# Altium PCB Analog_Audio_Processor.PcbDoc
Units mm, origin at the board's own origin, x right, y up, seen from the top; angles counter-clockwise.
Board outline 200 x 150 mm, 2 copper layers (Top Layer, Bottom Layer); 158 components, 105 nets, 435 pads, 17 vias.
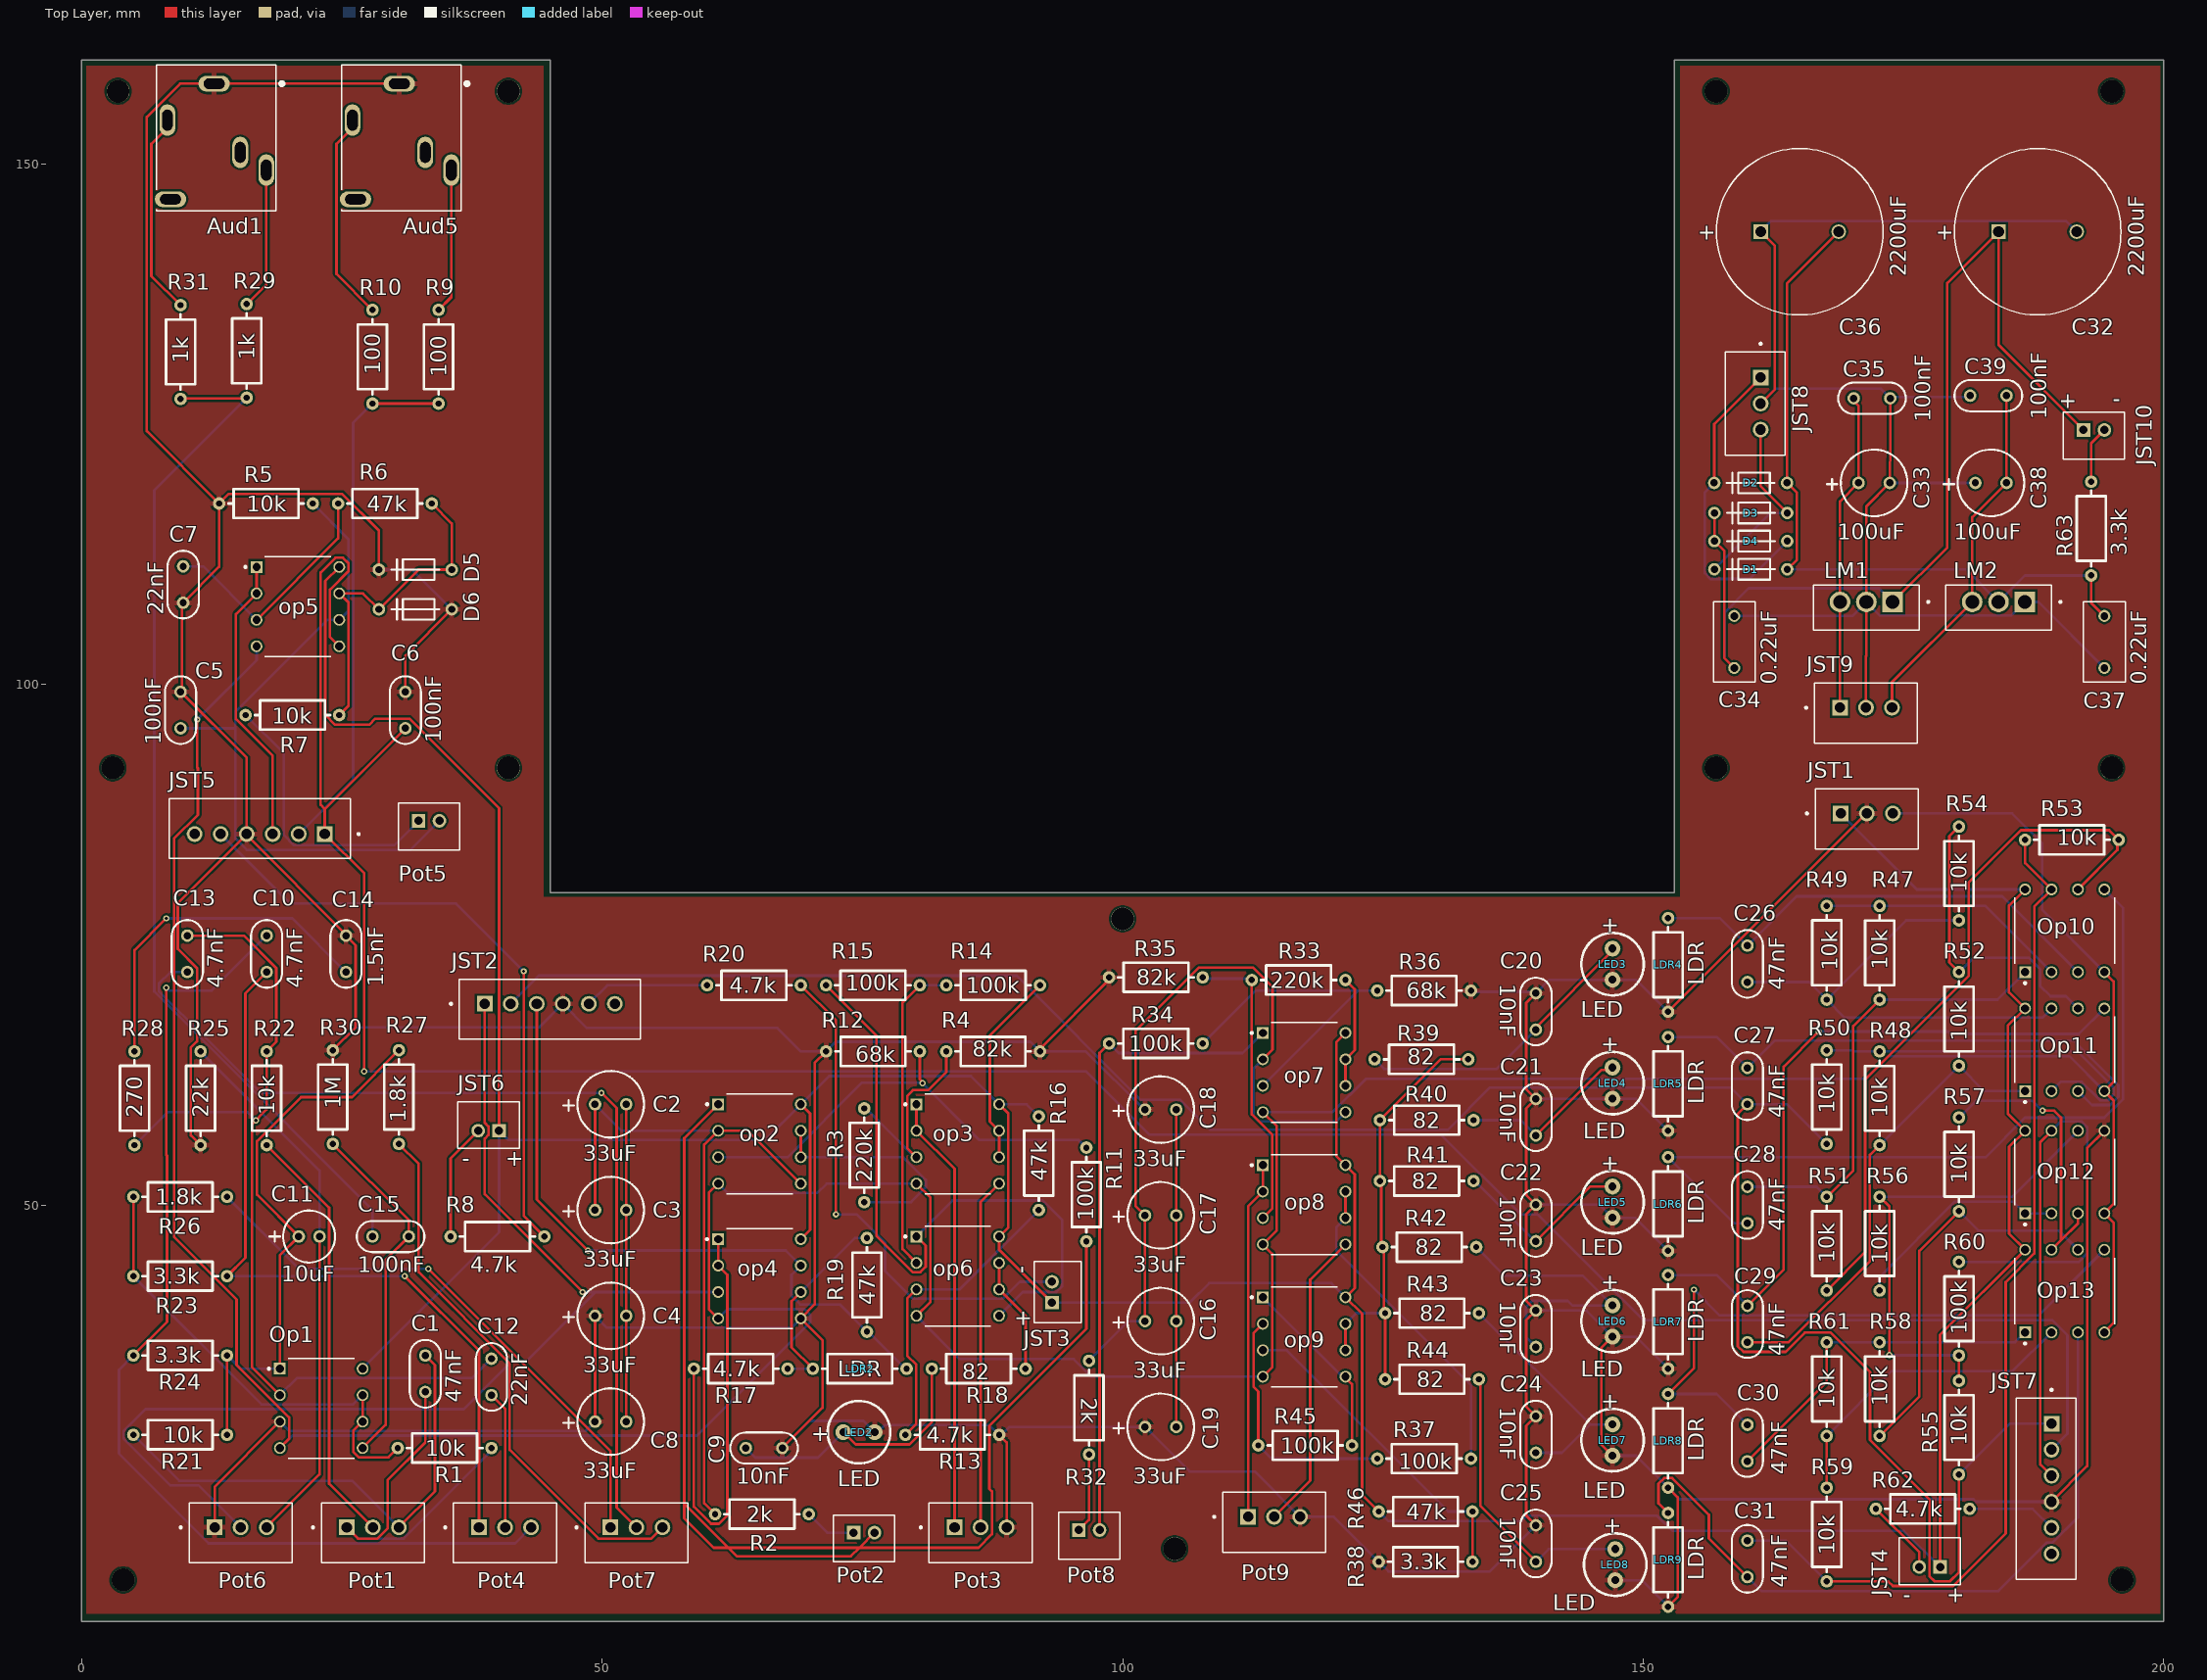
[diagram p0: Top Layer view]
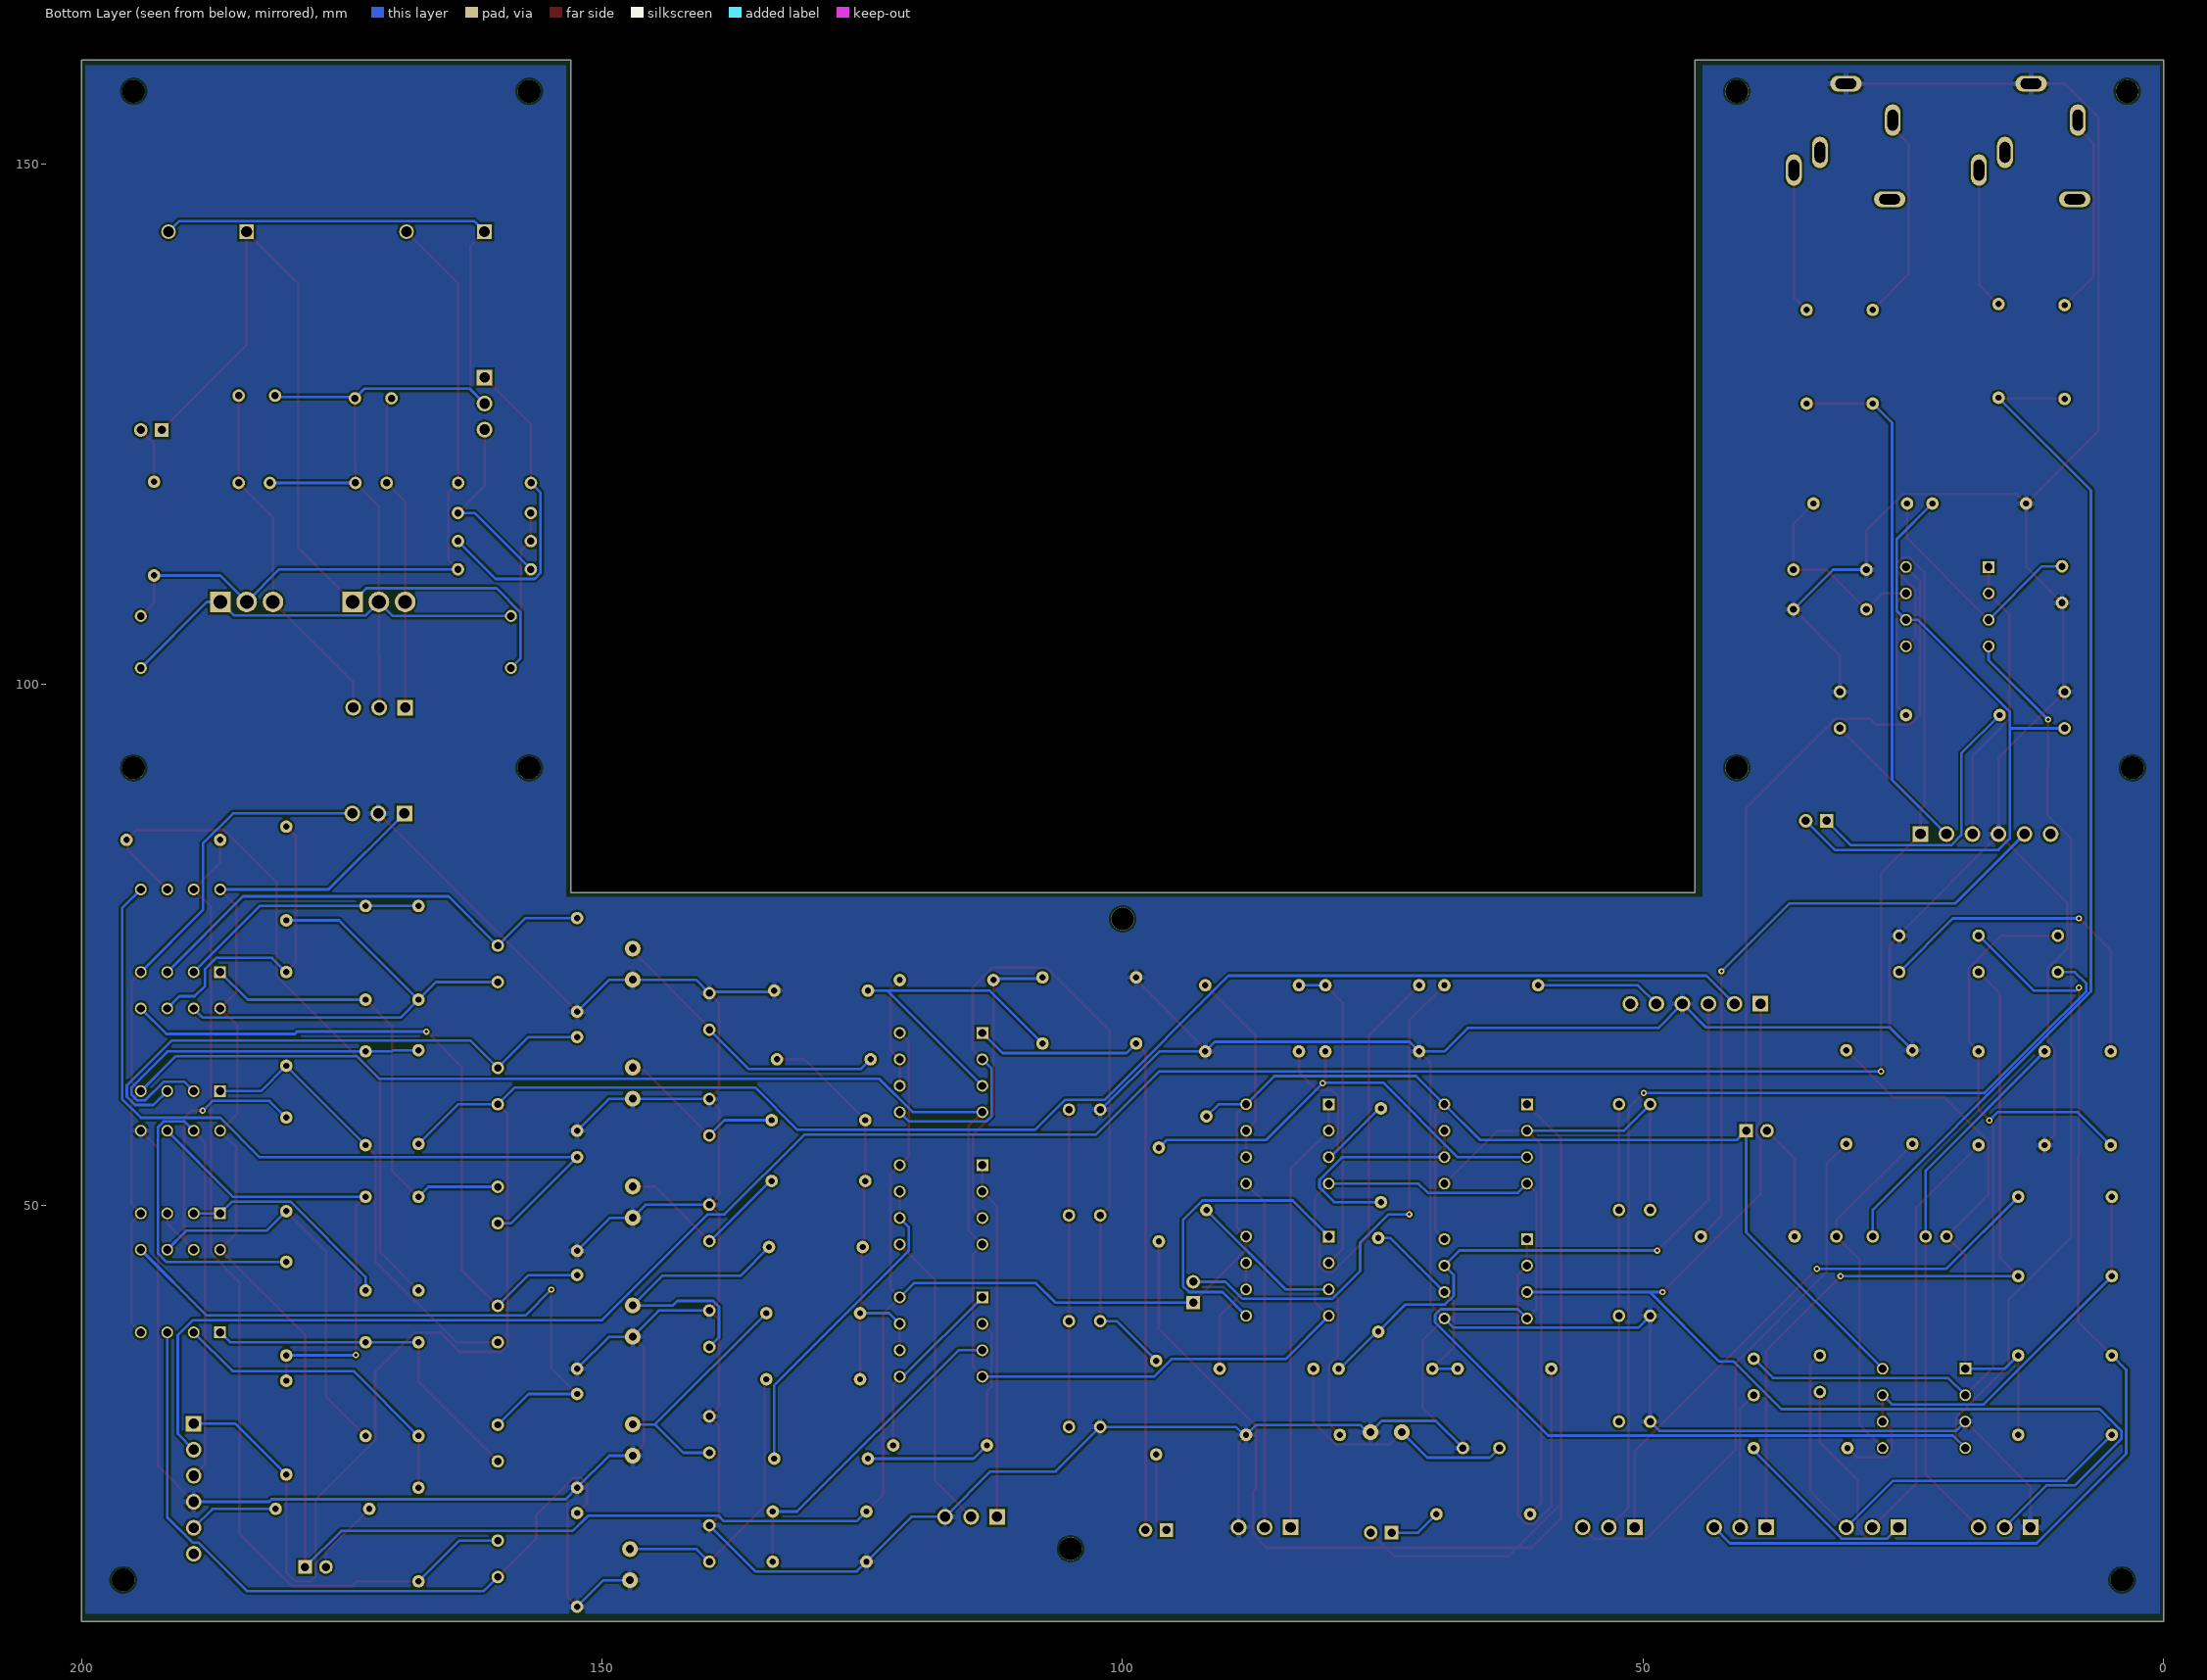
[diagram p1: Bottom Layer view, seen from below]

## Layer stack, top to bottom
Top Solder: solder mask 0.0102, Solder Resist, Dk 3.5
Top Layer: signal copper 0.0356
Dielectric 1: dielectric 0.32, FR-4, Dk 4.8
Bottom Layer: signal copper 0.0356
Bottom Solder: solder mask 0.0102, Solder Resist, Dk 3.5

## Board outline
0,10 0,160 45,160 45,80 153,80 153,160 200,160 200,10

## Design rules (kind name [scope] priority, off if disabled: settings)
BoardOutlineClearance [All] p1: gap=0.3 ignorepadtopadclearanceinfootprint=FALSE except(0.4: Arc-SplitBarrior Arc-SplitContinuation Track-SplitBarrior Track-SplitContinuation SMDPad-SplitBarrior SMDPad-SplitContinuation THPad-SplitBarrior THPad-SplitContinuation Via-SplitBarrior Via-SplitContinuation Fill-SplitBarrior Fill-SplitContinuation Poly-SplitBarrior Poly-SplitContinuation Region-SplitBarrior Region-SplitContinuation Text-SplitBarrior Text-SplitContinuation)
Clearance "Clearance Different Nets" [All] p1: gap=0.2 ignorepadtopadclearanceinfootprint=FALSE except(0.089: Arc-Arc Arc-Track Arc-SMDPad Track-Track Track-SMDPad; 0.127: SMDPad-SMDPad SMDPad-Via THPad-Via Via-Via; 0.254: Arc-Via Arc-Text Track-Via Track-Text SMDPad-Text THPad-Text Via-Text Fill-Text Poly-Text Region-Text Text-Text; 0.5: THPad-THPad Via-Hole)
Clearance "Clearance Same Nets" [All] p2: gap=0.2 ignorepadtopadclearanceinfootprint=FALSE except(0.089: Arc-Arc Arc-Track Arc-SMDPad Track-Track Track-SMDPad SMDPad-SMDPad; 0.127: SMDPad-Via THPad-Via; 0.254: Arc-Via Arc-Text Track-Via Track-Text SMDPad-Text THPad-Text Via-Via Via-Text Fill-Text Poly-Text Region-Text Text-Text)
Clearance "Clearance Bottom Layer" [OnLayer('Bottom Layer')] p3: gap=0.203 ignorepadtopadclearanceinfootprint=TRUE except(0.254: Arc-Text Track-Text SMDPad-Text THPad-Text Via-Text Fill-Text Poly-Text Region-Text Text-Text)
Clearance "Clearance Top Layer" [OnLayer('Top Layer')] p4: gap=0.203 ignorepadtopadclearanceinfootprint=TRUE except(0.254: Arc-Text Track-Text SMDPad-Text THPad-Text Via-Text Fill-Text Poly-Text Region-Text Text-Text)
HoleSize [All] p1: absolutevalues=TRUE maxlimit=6.3 minlimit=0.2 maxpercent=80.000 minpercent=20.000
MinimumAnnularRing [All] p1: minimumring=0.13
MinimumSolderMaskSliver [All] p1: minsoldermaskwidth=0.1
PolygonConnect PolygonConnect_1 [All] p1: thpad.connectstyle=Relief thpad.reliefconductorwidth=0.508 thpad.reliefentries=4 thpad.polygonreliefangle="90 Angle" thpad.airgapwidth=0.254 smdpad.connectstyle=Relief smdpad.reliefconductorwidth=0.508 smdpad.reliefentries=4 smdpad.polygonreliefangle="90 Angle" smdpad.airgapwidth=0.254 via.connectstyle=Direct via.reliefconductorwidth=0.508 via.reliefentries=4 via.polygonreliefangle="90 Angle" via.airgapwidth=0.254
RoutingCorners [All] p1: cornerstyle=Round minsetback=2.54 maxsetback=2.54
RoutingVias [All] p1: holewidth=0.5 width=1 viastyle="Through Hole" minholewidth=0.2 minwidth=0.35 maxholewidth=1 maxwidth=2
SilkToSilkClearance [All] p1: silktosilkclearance=0.1
SilkToSolderMaskClearance [IsPad] p1: minsilkscreentomaskgap=0.1 clearancetoexposedcopper=TRUE
SolderMaskExpansion [All] p1: expansion=0.102 istentingtop=FALSE
Width [All] p1: maxlimit=2.54 minlimit=0.089 preferedwidth=0.381
25 further rules are at their usual default settings.

## Classes and differential pairs
component class Tremolo: C2 C3 C4 C8 C9 JST2 JST3 LDR2 LED2 op2 op3 op4 op6 Pot2 Pot3 R2 R3 R4 R11 R12 R13 R14 R15 R16 R17 R18 R19 R20
component class Power_supply: C32 C33 C34 C35 C36 C37 C38 C39 D1 D2 D3 D4 JST8 JST9 JST10 LM1 LM2 R63
component class Phaser_2: C26 C27 C28 C29 C30 C31 JST4 JST7 LDR4 LDR5 LDR6 LDR7 LDR8 LDR9 Op10 Op11 Op12 Op13 R47 R48 R49 R50 R51 R52 R53 R54 R55 R56 R57 R58 R59 R60 R61 R62
component class Phaser_1: C16 C17 C18 C19 C20 C21 C22 C23 C24 C25 LED3 LED4 LED5 LED6 LED7 LED8 op7 op8 op9 Pot8 Pot9 R32 R33 R34 R35 R36 R37 R38 R39 R40 R41 R42 R43 R44 R45 R46
component class Inputbuffer_Equalizer: Aud1 C1 C10 C11 C12 C13 C14 C15 JST1 Op1 Pot1 Pot4 Pot6 Pot7 R1 R21 R22 R23 R24 R25 R26 R27 R28 R29 R30 R31
component class Distortion_outputbuffer: Aud5 C5 C6 C7 D5 D6 JST5 JST6 op5 Pot5 R5 R6 R7 R8 R9 R10

## Components (designator, comment, footprint, x,y, rotation, side; value= is the part's Value field where it differs from the comment)
Aud1 "Audio Female jack" "AUDIO FEMALE JACK" 89.448,153.285 r270 top
Aud5 "Audio Female jack" "AUDIO FEMALE JACK" 107.228,153.285 r270 top
C1 "47nF capacitor" 47nF 33.02,32.06 r90 top
C2 "33uF capacitor" 33uF 49.324,59.69 r0 top
C3 "33uF capacitor" 33uF 49.324,49.53 r0 top
C4 "33uF capacitor" 33uF 49.324,39.37 r0 top
C5 "100nF capacitor" 100nF 9.51,95.81 r90 top
C6 "100nF capacitor" 100nF 31.1,95.81 r90 top
C7 "22nF capacitor" 22nF 9.758,107.866 r90 top
C8 "33uF capacitor" 33uF 49.324,29.21 r0 top
C9 "10nF capacitor" 10nF 63.81,26.67 r0 top
C10 "4.7nF capacitor" 4.7nF 17.78,72.39 r90 top
C11 "10uF capacitor" 10uF 20.86,46.99 r0 top
C12 "22nF capacitor" 22nF 39.37,31.75 r90 top
C13 "4.7nF capacitor" 4.7nF 10.16,72.39 r90 top
C14 "1.5nF capacitor" 1.5nF 25.4,72.39 r90 top
C15 "100nF capacitor" 100nF 27.94,46.99 r0 top
C16 "33uF capacitor" 33uF 102.156,38.862 r0 top
C17 "33uF capacitor" 33uF 102.156,49.022 r0 top
C18 "33uF capacitor" 33uF 102.156,59.182 r0 top
C19 "33uF capacitor" 33uF 102.156,28.702 r0 top
C20 "10nF capacitor" 10nF 139.7,70.358 r270 top
C21 "10nF capacitor" 10nF 139.7,60.198 r270 top
C22 "10nF capacitor" 10nF 139.7,50.038 r270 top
C23 "10nF capacitor" 10nF 139.7,39.878 r270 top
C24 "10nF capacitor" 10nF 139.7,29.718 r270 top
C25 "10nF capacitor" 10nF 139.7,19.248 r270 top
C26 "47nF capacitor" 47nF 160.02,71.43 r90 top
C27 "47nF capacitor" 47nF 160.02,59.69 r90 top
C28 "47nF capacitor" 47nF 160.02,48.26 r90 top
C29 "47nF capacitor" 47nF 160.02,40.33 r270 top
C30 "47nF capacitor" 47nF 160.02,28.9 r270 top
C31 "47nF capacitor" 47nF 160.02,17.78 r270 top
C32 "2200uF capacitor" 2200uF 190.059,197.358 r0 top
C33 "100uF capacitor" 100uF 170.688,119.38 r0 top
C34 "0.22uF capacitor" 0.22uF 129.032,103.719 r90 top
C35 "100nF capacitor" 100nF 170.236,127.508 r0 top
C36 "2200uF capacitor" 2200uF 167.199,197.358 r0 top
C37 "0.22uF capacitor" 0.22uF 164.592,103.719 r90 top
C38 "100uF capacitor" 100uF 181.912,119.38 r0 top
C39 "100nF capacitor" 100nF 181.412,127.762 r0 top
D1 "1N4007 diode" 1N4148 163.847,111.081 r180 top
D2 "1N4007 diode" 1N4148 163.83,119.38 r180 top
D3 "1N4007 diode" 1N4148 163.847,116.497 r180 top
D4 "1N4007 diode" 1N4148 163.847,113.789 r180 top
D5 "1N4148 diode" 1N4148 35.56,111.05 r180 top
D6 "1N4148 diode" 1N4148 35.56,107.24 r180 top
JST1 "Power" 3pin_jst 168.823,68.563 r180 top
JST2 "Trem_out" 6pin_JST 39.771,-16.4 r180 top
JST3 "LED" 2pin_JST 103.928,39.481 r270 top
JST4 "LED" 2pin_JST 179.689,25.95 r0 top
JST5 "6pin_JST" 6pin_JST 22.317,171.392 r0 top
JST6 "LED" 2pin_JST 41.259,67.86 r0 top
JST7 "6pin_JST" 6pin_JST 103.488,27.967 r90 top
JST8 "Power" 3pin_jst 142.223,129.667 r90 top
JST9 "Power" 3pin_jst 168.743,78.723 r180 top
JST10 "LED" 2pin_JST 191.151,113.75 r180 top
LDR2 "LDR" LDR 70.248,34.29 r0 top
LDR4 "LDR" LDR 152.4,68.58 r90 top
LDR5 "LDR" LDR 152.4,57.15 r90 top
LDR6 "LDR" LDR 152.4,45.61 r90 top
LDR7 "LDR" LDR 152.4,34.29 r90 top
LDR8 "LDR" LDR 152.4,22.86 r90 top
LDR9 "LDR" LDR 152.4,11.43 r90 top
LED2 "Tremolo_LED" LED 74.676,28.194 r0 top
LED3 "LED" LED 147.066,73.152 r270 top
LED4 "LED" LED 147.066,61.722 r270 top
LED5 "LED" LED 147.066,50.292 r270 top
LED6 "LED" LED 147.066,38.862 r270 top
LED7 "LED" LED 147.066,27.432 r270 top
LED8 "LED" LED 147.32,15.47 r270 top
LM1 "LM7812" LM7812 168.651,71.596 r180 top
LM2 "LM7912" LM7912 181.351,71.596 r180 top
Op1 "TL072CP" TL072CP 27.592,67.945 r0 top
op2 "TL072CP" TL072CP 69.69,93.345 r0 top
op3 "TL072CP" TL072CP 88.74,93.345 r0 top
op4 "TL072CP" TL072CP 69.69,80.391 r0 top
op5 "TL072CP" TL072CP 25.352,144.959 r0 top
op6 "TL072CP" TL072CP 88.74,80.645 r0 top
op7 "TL072CP" TL072CP 122.014,100.203 r0 top
op8 "TL072CP" TL072CP 122.014,87.503 r0 top
op9 "TL072CP" TL072CP 122.014,74.803 r0 top
Op10 "TL072CP" TL072CP 153.035,80.932 r90 top
Op11 "TL072CP" TL072CP 153.035,69.502 r90 top
Op12 "TL072CP" TL072CP 153.035,57.752 r90 top
Op13 "TL072CP" TL072CP 153.035,46.322 r90 top
Pot1 "Equalizer_Bass" 3pin_jst 25.313,-0.017 r180 top
Pot2 "Tremolo_20k_potentiometer" 2pin_JST_non_polarized 73.009,7.832 r180 top
Pot3 "Tremolo_100k_potentiometer" 3pin_jst 83.693,-0.017 r180 top
Pot4 "Equalizer_Mid" 3pin_jst 38.013,-0.017 r180 top
Pot5 "Overdrive_potentiometer" 2pin_JST_non_polarized 31.211,76.21 r180 top
Pot6 "Volume" 3pin_jst 12.613,-0.017 r180 top
Pot7 "Equalizer_Treble" 3pin_jst 50.633,-0.017 r180 top
Pot8 "Phaser_20k_potentiometer" 2pin_JST_non_polarized 94.631,8.086 r180 top
Pot9 "Phaser_100k_potentiometer" 3pin_jst 111.887,0.999 r180 top
R1 "10k resistor" 10k 30.37,26.67 r0 top
R2 "2k resistor" 2k 60.85,20.32 r0 top
R3 "220k resistor" 220k 75.184,50.292 r90 top
R4 "82k resistor" 82k 92.058,64.77 r180 top
R5 "10k resistor" 10k 13.21,117.4 r0 top
R6 "47k resistor" 47k 33.64,117.4 r180 top
R7 "10k resistor" 10k 15.75,97.08 r0 top
R8 "4.7k resistor" 4.7k 35.45,46.99 r0 top
R9 "100ohm resistor" 100 34.29,136 r270 top
R10 "100ohm resistor" 100 27.94,136 r270 top
R11 "100k resistor" 100k 96.52,55.524 r270 top (schematic designator R?)
R12 "68k resistor" 68k 71.518,64.77 r0 top
R13 "4.7k resistor" 4.7k 79.138,27.94 r0 top
R14 "100k resistor" 100k 83.058,71.12 r0 top
R15 "100k resistor" 100k 80.518,71.12 r180 top
R16 "47k resistor" 47k 91.948,49.53 r90 top
R17 "4.7k resistor" 4.7k 67.818,34.29 r180 top
R18 "82ohm resistor" 82 90.678,34.29 r180 top
R19 "47k resistor" 47k 75.438,46.846 r270 top
R20 "4.7k resistor" 4.7k 69.088,71.12 r180 top
R21 "10k resistor" 10k 4.97,27.94 r0 top
R22 "10k resistor" 10k 17.78,55.77 r90 top
R23 "3.3k resistor" 3.3k 4.97,43.18 r0 top
R24 "3.3k resistor" 3.3k 4.97,35.56 r0 top
R25 "22k resistor" 22k 11.43,55.77 r90 top
R26 "1.8k resistor" 1.8k 4.97,50.8 r0 top
R27 "1.8k resistor" 1.8k 30.48,55.88 r90 top
R28 "270ohm resistor" 270 5.08,55.77 r90 top
R29 "1k resistor" 1k 15.86,127.56 r90 top
R30 "1M resistor" 1M 24.13,55.88 r90 top
R31 "1k resistor" 1k 9.51,127.45 r90 top
R32 "2k resistor" 2k 96.774,35.052 r270 top
R33 "220k resistor" 220k 121.412,71.628 r180 top
R34 "100k resistor" 100k 107.696,65.532 r180 top
R35 "82k resistor" 82k 98.696,71.882 r0 top
R36 "68k resistor" 68k 133.46,70.612 r180 top
R37 "100k resistor" 100k 124.46,25.654 r0 top
R38 "3.3k resistor" 3.3k 133.604,15.748 r180 top
R39 "82ohm resistor" 82 124.206,64.008 r0 top
R40 "82ohm resistor" 82 133.714,58.166 r180 top
R41 "82ohm resistor" 82 133.714,52.324 r180 top
R42 "82ohm resistor" 82 133.968,45.974 r180 top
R43 "82ohm resistor" 82 134.222,39.624 r180 top
R44 "82ohm resistor" 82 134.222,33.274 r180 top
R45 "100k resistor" 100k 113.03,26.924 r0 top
R46 "47k resistor" 47k 133.604,20.574 r180 top
R47 "10k resistor" 10k 172.72,78.74 r270 top
R48 "10k resistor" 10k 172.72,64.77 r270 top
R49 "10k resistor" 10k 167.64,69.74 r90 top
R50 "10k resistor" 10k 167.64,55.88 r90 top
R51 "10k resistor" 10k 167.64,41.8 r90 top
R52 "10k resistor" 10k 180.34,72.39 r270 top
R53 "10k resistor" 10k 195.69,85.09 r180 top
R54 "10k resistor" 10k 180.34,86.36 r270 top
R55 "10k resistor" 10k 180.34,24.13 r90 top
R56 "10k resistor" 10k 172.72,41.8 r90 top
R57 "10k resistor" 10k 180.34,49.42 r90 top
R58 "10k resistor" 10k 172.72,27.83 r90 top
R59 "10k resistor" 10k 167.64,13.86 r90 top
R60 "100k resistor" 100k 180.34,44.56 r270 top
R61 "10k resistor" 10k 167.64,27.83 r90 top
R62 "4.7k resistor" 4.7k 172.356,20.828 r0 top
R63 "3.3k resistor" 3.3k 193.04,110.49 r90 top

## Footprints (in the part's own frame and the unit in brackets; to place one, negate y for a bottom-side part, rotate by r counter-clockwise, add the part's x,y. Pads: shape width x height; smd on the part's side, far side on the other; paste and mask are expansions set on the pad)
0.22uF [mm]
  round 1.15 hole 0.75: 1(-2.119,-29.718) 2(2.881,-29.718)
  silkscreen extent -3.47,-31.72 4.23,-27.72
1.5nF [mm]
  round 1.2 hole 0.7: 1(0,0) 2(3.5,0)
  silkscreen extent -1.5,-1.5 5,1.5
1.8k [mm]
  round 1.2 hole 0.6: 1(0,0) 2(9,0)
  silkscreen extent 0.89,-1.4 8.13,1.4
1k [mm]
  round 1.2 hole 0.6: 1(0,0) 2(9,0)
  silkscreen extent 0.89,-1.4 8.13,1.4
1M [mm]
  round 1.2 hole 0.6: 1(0,0) 2(9,0)
  silkscreen extent 0.89,-1.4 8.13,1.4
1N4148 [mm]
  round 1.2 hole 0.7: A(0,0) K(7,0)
  silkscreen extent 1.2,-1 5.8,1
2k [mm]
  round 1.2 hole 0.6: 1(0,0) 2(9,0)
  silkscreen extent 0.89,-1.4 8.13,1.4
2pin_JST [mm]
  rect 1.308x1.308 / inner round 1.308 / far side rect 1.308x1.308 hole 0.8: 1(-1.159,-10.71)
  round 1.308 hole 0.8: 2(-3.159,-10.71)
  silkscreen extent -5.11,-12.41 0.79,-7.91, body extent -5.11,-12.41 0.79,-7.91, height 6
2pin_JST_non_polarized [mm]
  rect 1.308x1.308 / inner round 1.308 / far side rect 1.308x1.308 hole 0.8: 1(-1.159,-10.71)
  round 1.308 hole 0.8: 2(-3.159,-10.71)
  silkscreen extent -5.11,-12.41 0.79,-7.91, body extent -5.11,-12.41 0.79,-7.91, height 6
3.3k [mm]
  round 1.2 hole 0.6: 1(0,0) 2(9,0)
  silkscreen extent 0.89,-1.4 8.13,1.4
3pin_jst [mm]
  rect 1.508x1.508 / inner round 1.508 / far side rect 1.508x1.508 hole 1: 1(-0.167,-19.067)
  round 1.508 hole 1: 2(-2.667,-19.067) 3(-5.167,-19.067)
  silkscreen extent -7.62,-21.42 3.18,-15.67, body extent -7.62,-21.42 2.28,-15.67, height 7
4.7k [mm]
  round 1.2 hole 0.6: 1(0,0) 2(9,0)
  silkscreen extent 0.89,-1.4 8.13,1.4
4.7nF [mm]
  round 1.2 hole 0.7: 1(0,0) 2(3.5,0)
  silkscreen extent -1.5,-1.5 5,1.5
6pin_JST [mm]
  rect 1.508x1.508 / inner round 1.508 / far side rect 1.508x1.508 hole 1: 1(1.043,-85.742)
  round 1.508 hole 1: 2(-1.457,-85.742) 3(-3.957,-85.742) 4(-6.457,-85.742) 5(-8.957,-85.742) 6(-11.457,-85.742)
  silkscreen extent -13.91,-88.09 4.39,-82.34, body extent -13.91,-88.09 3.49,-82.34, height 7
10k [mm]
  round 1.2 hole 0.6: 1(0,0) 2(9,0)
  silkscreen extent 0.89,-1.4 8.13,1.4
10nF [mm]
  round 1.2 hole 0.7: 1(0,0) 2(3.5,0)
  silkscreen extent -1.5,-1.5 5,1.5
10uF [mm]
  round 1.2 hole 0.7: 1(0,0) 2(2,0)
  silkscreen extent -2.79,-2.5 3.5,2.5
22k [mm]
  round 1.2 hole 0.6: 1(0,0) 2(9,0)
  silkscreen extent 0.89,-1.4 8.13,1.4
22nF [mm]
  round 1.2 hole 0.7: 1(0,0) 2(3.5,0)
  silkscreen extent -1.5,-1.5 5,1.5
33uF [mm]
  round 1.2 hole 0.7: 1(0,0) 2(3,0)
  silkscreen extent -3.05,-3.2 4.7,3.2
47k [mm]
  round 1.2 hole 0.6: 1(0,0) 2(9,0)
  silkscreen extent 0.89,-1.4 8.13,1.4
47nF [mm]
  round 1.2 hole 0.7: 1(0,0) 2(3.5,0)
  silkscreen extent -1.5,-1.5 5,1.5
68k [mm]
  round 1.2 hole 0.6: 1(0,0) 2(9,0)
  silkscreen extent 0.89,-1.4 8.13,1.4
82 [mm]
  round 1.2 hole 0.6: 1(0,0) 2(9,0)
  silkscreen extent 0.89,-1.4 8.13,1.4
82k [mm]
  round 1.2 hole 0.6: 1(0,0) 2(9,0)
  silkscreen extent 0.89,-1.4 8.13,1.4
100 [mm]
  round 1.2 hole 0.6: 1(0,0) 2(9,0)
  silkscreen extent 0.89,-1.4 8.13,1.4
100k [mm]
  round 1.2 hole 0.6: 1(0,0) 2(9,0)
  silkscreen extent 0.89,-1.4 8.13,1.4
100nF [mm]
  round 1.2 hole 0.7: 1(0,0) 2(3.5,0)
  silkscreen extent -1.5,-1.5 5,1.5
100uF [mm]
  round 1.2 hole 0.7: 1(0,0) 2(3,0)
  silkscreen extent -3.05,-3.2 4.7,3.2
220k [mm]
  round 1.2 hole 0.6: 1(0,0) 2(9,0)
  silkscreen extent 0.89,-1.4 8.13,1.4
270 [mm]
  round 1.2 hole 0.6: 1(0,0) 2(9,0)
  silkscreen extent 0.89,-1.4 8.13,1.4
2200uF [mm]
  rect 1.4x1.4 hole 1.05: 1(-5.909,-53.848)
  round 1.4 hole 1.05: 2(1.591,-53.848)
  silkscreen extent -10.16,-61.84 5.84,-45.85, body extent -10.16,-61.84 5.84,-45.85, height 25
"AUDIO FEMALE JACK" [mm]
  oval 1.508x3.016 hole 1 slot 2 at 90 deg: 1(-4.445,-76.708) 4(6.655,-80.908)
  oval 3.016x1.508 hole 1 slot 2 at 0 deg: 2(-0.945,-81.208) 3(3.855,-71.708) 5(2.155,-74.208)
  silkscreen extent -6.24,-82.26 7.75,-70.04, body extent -9.77,-82.3 7.73,-70.8, height 6
LDR [mm]
  round 1.2 hole 0.6: 1(0,0) 2(9,0)
  silkscreen extent 0.89,-1.4 8.13,1.4
LED [mil]
  round 60 hole 30: 1(-59.06,0) 2(59.06,0)
  silkscreen extent -118,-118 118,118
LM7812 [mm]
  rect 1.98x1.98 / inner round 1.98 / far side rect 1.98x1.98 hole 1.32: 1(-5.329,-36.354)
  round 1.98 hole 1.32: 2(-2.794,-36.354) 3(-0.259,-36.354)
  silkscreen extent -8.83,-37.99 2.29,-33.64, body extent -7.89,-38.03 2.31,-33.53, height 19.22
LM7912 [mm]
  round 1.98 hole 1.32: 1(-2.794,-36.354) 3(-0.259,-36.354)
  rect 1.98x1.98 / inner round 1.98 / far side rect 1.98x1.98 hole 1.32: 2(-5.329,-36.354)
  silkscreen extent -8.83,-37.99 2.29,-33.64, body extent -7.89,-38.03 2.31,-33.53, height 19.22
TL072CP [mm]
  rect 1.13x1.13 / inner round 1.13 / far side rect 1.13x1.13 hole 0.78 mask+0.102: 1(-8.542,-33.655)
  round 1.13 hole 0.78 mask+0.102: 2(-8.542,-36.195) 3(-8.542,-38.735) 4(-8.542,-41.275) 5(-0.602,-41.275) 6(-0.602,-38.735) 7(-0.602,-36.195) 8(-0.602,-33.655)
  silkscreen extent -9.71,-42.26 -1.4,-32.67, body extent -8.72,-42.26 -0.42,-32.67, height 5.08

## Part data
JST1 JST8 JST9 Pot1 Pot3 Pot4 Pot6 Pot7 Pot9: library part 3pin_jst
JST2: library part 6pin_JST
JST3 JST4 JST6 JST10: library part 2pin_JST
LED2: library part LED
Pot2 Pot5 Pot8: library part 2pin_jst_non_polarized

## Free pads (board coordinates)
  round 2.2 hole 2.2 unplated: 12(3,92) 12(3.5,157) 12(4,14) 12(41,92) 12(41,157) 12(100,77.5) 12(105,17) 12(157,92) 12(157,157) 12(195,92) 12(195,157) 12(196,14)

## Via types
v1: diameter 0.6, hole 0.3, Top Layer to Bottom Layer, 17 vias

## Nets (pads, with @x,y where several pads share a name; then routed paths per layer and width w, separated by ;. In a path a pad name is that pad's centre, name@x,y a point inside that pad or via, vN(x,y) a via of type N, cw(c..) or ccw(c..) an arc to the next point about the centre after c; other vN are vias at no path point)
+12: JST1.1 JST3.1 JST4.1 JST6.1 Op1.8 op2.8 op3.8 op4.8 op5.8 op6.8 op7.8 op8.8 op9.8 Op10.8 Op11.8 Op12.8 Op13.8 R16.2 R46.2 | length 414.8
  Top Layer w0.25: op5.8 23.41,109.964 23.41,97.112 24.367,96.155 27.635,96.155 28.215,96.735 31.483,96.735 40.1,88.118 JST6.1 ; op4.8 69.978,47.626 69.978,58.8 op2.8 ; op3.8 89.028,58.8 89.028,47.88 op6.8 88.138,45.72 JST3.1 ; op7.8 120.522,65.658 120.522,54.738 op8.8 122.302,52.958 122.302,42.038 op9.8 123.001,39.559 123.001,22.177 R46.2 ; JST4.1 178.53,37.56 Op13.8 185.166,47.244 185.166,55.626 Op12.8 185.039,58.801 185.039,67.249 Op11.8 185.141,70.449 185.141,78.781 Op10.8
  Bottom Layer w0.25: Op1.8 40.1,47.4 JST6.1 40.99,56.26 65.658,56.26 op2.8 71.799,62.401 85.427,62.401 op3.8 90.788,59.69 R16.2 ; JST3.1 106.441,40.64 108.321,42.52 120.04,42.52 op9.8 ; R46.2 125.529,19.649 138.305,19.649 138.829,20.173 151.349,20.173 152.817,18.705 175.065,18.705 JST4.1 ; JST1.1 176.29,80.33 Op10.8
-12: JST1.3 Op1.4 op2.4 op3.4 op4.4 op5.4 op6.4 op7.4 op8.4 op9.4 Op10.4 Op11.4 Op12.4 Op13.4 | length 413.3
  Top Layer w0.25: v1(11.1,96.647) 11.1,92.06 11.176,91.984 11.176,87.492 8.883,85.199 8.883,46.959 14.895,40.947 14.895,34.646 19.94,29.601 19.94,27.56 Op1.4 ; op4.4 60.258,40.006 60.258,51.18 op2.4 ; op6.4 81.538,40.71 81.538,50.73 op3.4 ; op9.4 114.362,34.418 114.362,45.338 op8.4 114.812,47.568 114.812,57.588 op7.4 ; Op13.4 195.2,38.67 195.2,48.32 Op12.4 195.2,50.1 195.2,60.07 Op11.4 195.2,61.85 195.2,71.5 Op10.4
  Bottom Layer w0.25: v1(11.1,96.647) 16.81,102.357 op5.4 ; Op1.4 20.25,27.87 59.101,27.87 69.978,38.747 69.978,39.485 69.457,40.006 62.038,40.006 op4.4 ; op2.4 62.038,51.18 70.673,51.18 71.563,52.07 op3.4 ; op6.4 84.353,35.215 95.303,35.215 96.99,33.528 op9.4 ; op7.4 120.153,58.928 123.36,62.135 171.393,62.135 173.573,64.315 190.955,64.315 Op11.4 ; JST1.3 185.458,87.63 188.34,84.748 188.34,78.36 Op10.4
GND: Aud1.1 Aud5.1 C4.1 C5.2 C6.2 C7.1 C8.1 C9.2 C14.2 C18.1 C19.1 C20.1 C21.1 C22.1 C23.1 C24.1 C25.1 D5.K D6.A JST1.2 JST2.4 JST5.4 JST7.4 LDR4.1 LDR5.1 LDR6.1 LDR7.1 LDR8.1 LDR9.1 LED2.2 LED3.2 LED4.2 LED5.2 LED6.2 LED7.2 LED8.2 Op1.3 op4.5 Op12.5 Pot3.3 Pot6.1 Pot9.3 R4.1 R5.1 R12.1 R13.2 R25.1 R30.2 R35.1 R36.1 R38.2 | length 762
  Top Layer w0.25: R25.1 10.505,56.695 10.505,65.153 11.085,65.733 11.085,72.773 9.235,74.623 9.235,79.025 JST5.4 ; Pot6.1 12.78,22.94 Op1.3 ; R30.2 26.325,67.075 26.325,74.965 C14.2 25.4,76 15.86,85.54 JST5.4 ; D5.K 28.56,114.788 25.023,118.325 14.135,118.325 R5.1 ; Aud5.1 Aud1.1 9.46,157.73 6.257,154.527 6.257,124.353 R5.1 ; C6.2 31.1,102.78 D6.A ; C8.1 C4.1 ; C9.2 71.173,30.533 71.173,37.031 op4.5 70.428,40.456 70.428,63.68 R12.1 ; R13.2 88.86,27.218 Pot3.3 ; R4.1 92.058,65.007 98.696,71.645 R35.1 ; C25.1 138.775,20.173 138.775,28.793 C24.1 138.775,30.643 138.775,38.953 C23.1 138.775,40.803 138.775,49.113 C22.1 138.775,50.963 138.775,59.273 C21.1 138.775,61.123 138.775,69.433 C20.1 ; LED7.2 145.979,27.019 145.979,36.275 LED6.2 ; LDR9.1 153.325,12.355 153.325,21.935 LDR8.1 ; LDR4.1 152.4,68.618 171.412,87.63 JST1.2 ; JST7.4 192.66,24.94 192.66,55.5 Op12.5 ; R5.1 13.21,111.318 C7.1 9.634,107.742 9.634,99.434 C5.2 15.86,92.96 JST5.4
  Bottom Layer w0.25: Op1.3 19.94,28.32 48.434,28.32 C8.1 ; R30.2 26.332,67.082 43.968,67.082 JST2.4 48.543,67.027 66.831,67.027 69.088,64.77 R12.1 72.443,65.695 91.133,65.695 R4.1 96.463,64.77 102.051,59.182 C18.1 ; D5.K 31.75,111.05 D6.A ; C4.1 50.468,38.226 68.198,38.226 op4.5 ; C9.2 69.921,29.281 75.089,29.281 LED2.2 76.442,28.194 77.113,28.865 87.213,28.865 R13.2 88.356,27.94 89.118,28.702 C19.1 106.445,24.413 112.707,24.413 Pot9.3 120.286,20.066 R38.2 125.529,14.823 135.275,14.823 C25.1 ; R36.1 133.587,70.485 139.573,70.485 C20.1 140.994,71.652 LED3.2 149.328,71.652 LDR4.1 ; C23.1 144.55,39.878 LED6.2 149.328,37.362 LDR7.1 ; C22.1 145.82,50.038 LED5.2 149.218,48.792 LDR6.1 ; C21.1 143.296,60.198 143.32,60.222 LED4.2 149.328,60.222 LDR5.1 ; LED7.2 149.328,25.932 LDR8.1 153.507,21.753 181.739,21.753 181.982,21.51 JST7.4 ; LED8.2 149.86,13.97 LDR9.1
NetAud1_2: Aud1.2 R31.2 | length 19.6
  Top Layer w0.25: Aud1.2 8.24,153.476 6.707,151.943 6.707,139.253 R31.2
NetAud1_3: Aud1.3 R29.2 | length 13.6
  Top Layer w0.25: R29.2 17.74,138.44 Aud1.3
NetAud5_2: Aud5.2 R10.1 | length 20.3
  Top Layer w0.25: Aud5.2 26.02,153.476 24.487,151.943 24.487,139.453 R10.1
NetAud5_3: Aud5.3 R9.1 | length 13.9
  Top Layer w0.25: R9.1 35.52,137.23 Aud5.3
NetC1_1: C1.1 Pot1.1 R1.2 | length 37.5
  Top Layer w0.25: Pot1.1 26.559,17.971 28.427,17.971 29.401,18.945 29.401,23.564 33.02,27.183 C1.1
  Bottom Layer w0.25: Pot1.1 26.559,17.971 30.927,17.971 39.37,26.414 R1.2
NetC1_2: C1.2 Pot1.3 R21.1 | length 47.5
  Top Layer w0.25: Pot1.3 33.945,22.515 33.945,34.635 C1.2
  Bottom Layer w0.25: R21.1 9.386,23.524 26.006,23.524 Pot1.3
NetC2_1: C2.1 C3.1 op2.2 op2.5 R2.1 | length 70.9
  Top Layer w0.25: C3.1 C2.1 ; R2.1 59.808,21.362 59.808,55.81 op2.2 64.008,57.15 op2.5
  Bottom Layer w0.25: C2.1 51.864,57.15 op2.2
NetC2_2: C2.2 C3.2 C4.2 C8.2 | length 30.5
  Top Layer w0.25: C8.2 C4.2 C3.2 C2.2
NetC5_1: C5.1 op5.6 Pot5.2 R5.2 | length 65.2
  Bottom Layer w0.25: C5.1 14.757,95.81 ; R5.2 25.64,113.97 25.64,107.114 op5.6 23.586,106.224 14.781,97.419 14.781,85.203 15.863,84.121 31.571,84.121 Pot5.2
NetC6_1: C6.1 JST5.1 JST7.2 op5.5 | length 258.9
  Top Layer w0.25: op5.5 23.86,104.574 23.86,109.133 25.64,110.913 25.64,111.673 25.119,112.194 24.381,112.194 22.96,110.773 22.96,88.462 23.36,88.062 ; v1(27.153,62.848) 27.153,81.857 JST5.1 23.36,88.062 ; C6.1 31.1,95.802 23.36,88.062
  Bottom Layer w0.25: v1(27.153,62.848) 80.078,62.848 80.09,62.86 96.491,62.86 102.56,56.791 130.555,56.791 138.233,49.113 139.852,49.113 150.01,38.955 189.314,38.955 190.754,37.515 190.754,28.034 JST7.2
NetC7_2: C7.2 op5.3 R6.2 | length 23.6
  Top Layer w0.25: op5.3 24.64,114.054 R6.2
  Bottom Layer w0.25: C7.2 11.668,111.366 op5.3
NetC9_1: C9.1 LED2.1 R18.2 | length 25.8
  Top Layer w0.25: LED2.1 74.355,27.015 79.521,27.015 81.678,29.172 R18.2
  Bottom Layer w0.25: C9.1 64.735,25.745 70.727,25.745 LED2.1
NetC10_1: C10.1 Pot4.1 R23.2 | length 74.9
  Top Layer w0.25: R23.2 15.733,44.943 15.733,70.343 C10.1 ; v1(31.039,43.18) 38.18,36.039 Pot4.1
  Bottom Layer w0.25: R23.2 v1(31.039,43.18)
NetC10_2: C10.2 Pot4.3 R24.1 | length 102.4
  Top Layer w0.25: R24.1 8.204,38.794 8.204,54.757 8.128,54.834 v1(8.128,70.891)
  Bottom Layer w0.25: R24.1 3.595,34.185 3.595,26.123 12.197,17.521 41.651,17.521 Pot4.3 ; v1(8.128,70.891) 8.407,70.612 12.502,70.612 C10.2
NetC11_1: C11.1 Op1.1 R21.2 R24.2 R27.2 | length 54.7
  Top Layer w0.25: R21.2 R24.2 ; Op1.1 19.05,45.18 C11.1 16.855,50.995 16.855,56.153 21.081,60.38 25.98,60.38 R27.2
  Bottom Layer w0.25: R24.2 15.24,34.29 Op1.1
NetC11_2: C11.2 Pot6.3 R25.2 | length 52.6
  Top Layer w0.25: Pot6.3 22.86,24.13 C11.2
  Bottom Layer w0.25: R25.2 22.86,53.34 C11.2
NetC12_1: C12.1 Pot4.2 | length 13.2
  Top Layer w0.25: C12.1 40.68,30.44 Pot4.2
NetC12_2: C12.2 C13.2 Op1.2 R22.2 R28.1 | length 88
  Top Layer w0.25: C13.2 15.588,75.89 18.705,72.773 18.705,65.695 R22.2 17.78,59.182 16.358,57.76 16.358,34.442 Op1.2
  Bottom Layer w0.25: R28.1 8.238,58.928 15.951,58.928 v1(16.739,58.141) ; Op1.2 20.7,33.4 37.52,33.4 C12.2
NetC13_1: C13.1 Pot7.2 | length 93.6
  Top Layer w0.25: v1(49.936,60.782) 51.399,59.32 51.399,20.951 Pot7.2
  Bottom Layer w0.25: C13.1 8.54,72.39 7.427,71.277 7.427,70.556 11.949,66.034 11.954,66.034 17.205,60.782 v1(49.936,60.782)
NetC14_1: C14.1 R28.2 | length 33.4
  Top Layer w0.25: R28.2 5.08,74.498 v1(8.128,77.546)
  Bottom Layer w0.25: v1(8.128,77.546) 20.244,77.546 C14.1
NetC15_1: C15.1 R29.1 R31.1 | length 99.3
  Top Layer w0.25: R31.1 9.565,127.505 15.805,127.505 R29.1
  Bottom Layer w0.25: R29.1 6.977,118.677 6.977,70.527 11.809,65.695 11.813,65.695 27.94,49.568 C15.1
NetC15_2: C15.2 Op1.5 R30.1 | length 34.1
  Top Layer w0.25: R30.1 31.44,48.57 C15.2 29.208,44.758 29.208,28.888 Op1.5
NetC16_1: C16.1 C17.1 op7.2 op7.5 R32.1 | length 74.2
  Top Layer w0.25: C16.1 C17.1 101.231,49.947 101.231,66.725 107.313,72.807 112.541,72.807 114.402,70.947 114.402,64.938 op7.2
  Bottom Layer w0.25: R32.1 100.584,38.862 C16.1 ; op7.2 112.582,63.118 112.582,58.559 113.103,58.038 120.522,58.038 op7.5
NetC16_2: C16.2 C17.2 C18.2 C19.2 | length 30.5
  Top Layer w0.25: C19.2 C16.2 C17.2 C18.2
NetC20_2: C20.2 LED3.1 R39.1 | length 28.3
  Top Layer w0.25: C20.2 139.7,67.072 147.066,74.438 LED3.1
  Bottom Layer w0.25: R39.1 125.131,63.083 135.925,63.083 C20.2
NetC21_2: C21.2 LED4.1 R40.1 | length 16.7
  Top Layer w0.25: C21.2 145.98,62.978 146.822,62.978 LED4.1
  Bottom Layer w0.25: R40.1 138.232,58.166 C21.2
NetC22_2: C22.2 LED5.1 R41.1 | length 17.9
  Top Layer w0.25: C22.2 144.954,51.792 LED5.1
  Bottom Layer w0.25: R41.1 133.814,52.324 139.6,46.538 C22.2
NetC23_2: C23.2 LED6.1 R42.1 | length 28.4
  Bottom Layer w0.25: R42.1 136.72,43.222 144.206,43.222 LED6.1 143.208,40.362 142.767,40.803 139.317,40.803 138.775,40.261 138.775,37.303 C23.2
NetC24_2: C24.2 LED7.1 R43.1 | length 23.6
  Bottom Layer w0.25: R43.1 144.914,28.932 ; C24.2 142.2,26.218 144.914,28.932 ; LED7.1 144.914,28.932
NetC25_2: C25.2 LED8.1 R44.1 | length 27.9
  Top Layer w0.25: R44.1 134.385,33.111 134.385,21.101 139.7,15.786 C25.2
  Bottom Layer w0.25: C25.2 140.922,16.97 LED8.1
NetC26_1: C26.1 Op11.7 R49.1 R54.2 | length 46.9
  Bottom Layer w0.25: C26.1 165.95,71.43 R49.1 ; R54.2 175.26,77.36 R49.1 ; Op11.7 188.34,68.01 169.37,68.01 R49.1
NetC26_2: C26.2 LDR4.2 Op10.3 | length 45.4
  Bottom Layer w0.25: LDR4.2 157.37,77.58 C26.2 164.755,79.665 184.495,79.665 Op10.3
NetC27_1: C27.1 JST2.2 JST7.1 R50.1 R55.1 | length 222.2
  Top Layer w0.25: C27.1 159.095,58.765 159.095,36.447 159.637,35.905 163.69,35.905 165.54,37.755 168.023,37.755 171.795,33.983 171.795,27.447 177.509,21.733 177.509,14.363 178.003,13.868 179.451,13.868 180.34,14.757 R55.1
  Bottom Layer w0.25: JST2.2 43.931,72.045 89.825,72.045 101.763,60.107 105.539,60.107 108.405,57.241 131.241,57.241 135.309,61.309 158.401,61.309 C27.1 163.83,59.69 R50.1 ; R55.1 185.22,29.01 JST7.1
NetC27_2: C27.2 LDR5.2 Op11.3 | length 53.2
  Bottom Layer w0.25: LDR5.2 157.06,66.15 C27.2 162.635,65.805 191.36,65.805 195.65,61.515 195.65,60.405 194.865,59.62 193.11,59.62 Op11.3
NetC28_1: C28.1 LDR6.2 Op10.5 | length 77.1
  Bottom Layer w0.25: C28.1 158.75,48.26 LDR6.2 182.891,54.61 186.683,58.401 194.294,58.401 196.1,60.207 196.1,78.54 Op10.5
NetC28_2: C28.2 Op10.1 R47.2 R51.2 | length 44.1
  Top Layer w0.25: R51.2 170.18,53.34 170.18,67.2 R47.2
  Bottom Layer w0.25: C28.2 166.68,51.76 R51.2 ; R47.2 184.04,69.74 Op10.1
NetC29_1: C29.1 LDR7.2 Op11.5 | length 66.6
  Top Layer w0.25: C29.1 163.506,43.816 163.506,63.303 v1(166.878,66.675)
  Bottom Layer w0.25: LDR7.2 157.06,43.29 C29.1 ; v1(166.878,66.675) 179.3,66.675 179.529,66.446 191.856,66.446 Op11.5
NetC29_2: C29.2 Op11.1 R48.2 R52.2 | length 44.7
  Top Layer w0.25: C29.2 163.978,36.83 171.78,44.632 171.78,54.83 R48.2
  Bottom Layer w0.25: R48.2 R52.2 182.77,60.96 Op11.1
NetC30_1: C30.1 LDR8.2 Op13.5 | length 63
  Top Layer w0.25: LDR8.2 154.889,34.349 v1(154.889,41.885)
  Bottom Layer w0.25: LDR8.2 157.06,31.86 C30.1 ; v1(154.889,41.885) 157.369,39.405 187.995,39.405 Op13.5
NetC30_2: C30.2 Op13.1 R58.2 R61.2 | length 34
  Top Layer w0.25: C30.2 167.64,33.02 R61.2
  Bottom Layer w0.25: R61.2 R58.2 185.74,36.83 Op13.1
NetC31_1: C31.1 Op10.7 R53.2 R59.1 | length 98.2
  Top Layer w0.25: R59.1 173.546,13.86 173.988,13.418 179.788,13.418 184.836,18.466 184.836,42.607 187.58,45.351 187.58,78.68 Op10.7 186.69,82.87 R53.2
  Bottom Layer w0.25: C31.1 163.72,17.78 R59.1
NetC31_2: C31.2 LDR9.2 Op13.3 | length 70.2
  Top Layer w0.25: LDR9.2 151.475,21.355 151.475,23.243 152.017,23.785 152.783,23.785 156.311,20.257 156.311,17.989 C31.2
  Bottom Layer w0.25: C31.2 161.365,12.935 184.129,12.935 188.783,17.589 189.335,17.589 191.77,20.024 Op13.3
NetC32_1: C32.1 C34.1 D3.K D4.K JST10.1 LM1.1 | length 101.3
  Top Layer w0.25: D3.K D4.K 157.803,112.833 157.803,102.547 C34.1 ; LM1.1 179.21,113.18 179.21,138.57 C32.1 184.15,132.62 JST10.1
  Bottom Layer w0.25: C34.1 157.85,102.5 157.85,106.973 160.142,109.265 172.665,109.265 LM1.1
NetC32_2: C32.2 C33.2 C34.2 C35.2 C36.1 C37.1 C38.1 C39.1 JST8.2 JST9.2 LM1.2 LM2.2 | length 148.8
  Top Layer w0.25: JST8.2 162.662,128.372 162.662,142.138 C36.1 ; JST9.2 171.41,102.744 171.445,102.779 LM1.2 171.445,117.137 C33.2 173.736,123.492 C35.2
  Bottom Layer w0.25: C34.2 170.095,106.6 LM1.2 172.76,106.635 185.365,106.635 LM2.2 187.96,107.95 C37.1 ; JST8.2 162.723,128.433 172.811,128.433 C35.2 173.863,127.635 181.285,127.635 C39.1 ; C36.1 162.315,144.535 190.625,144.535 C32.2 ; C33.2 C38.1
NetC33_1: C33.1 C35.1 JST9.1 LM1.3 | length 30.6
  Top Layer w0.25: JST9.1 LM1.3 168.91,117.602 C33.1 170.688,126.799 170.236,127.251 C35.1
NetC36_2: C36.2 C37.2 D1.A D2.A LM2.1 R63.1 | length 71.2
  Top Layer w0.25: D1.A 164.772,112.007 164.772,118.438 D2.A 163.83,138.55 C36.2 ; R63.1 193.04,107.87 C37.2
  Bottom Layer w0.25: D1.A 181.014,111.082 LM2.1 186.685,110.49 R63.1
NetC38_2: C38.2 C39.2 JST9.3 LM2.3 | length 34.5
  Top Layer w0.25: JST9.3 173.91,100.25 LM2.3 181.61,116.078 C38.2 C39.2
NetD1_K: D1.K D3.A JST8.3 | length 18.3
  Top Layer w0.25: JST8.3 161.29,119.055 D3.A
  Bottom Layer w0.25: D1.K 162.263,116.498 D3.A
NetD2_K: D2.K D4.A JST8.1 | length 30.7
  Top Layer w0.25: D2.K 156.83,125.04 JST8.1
  Bottom Layer w0.25: D2.K 155.922,118.472 155.922,110.698 156.464,110.156 160.214,110.156 D4.A
NetD5_A: D5.A D6.K op5.7 R6.1 R7.2 | length 32.6
  Top Layer w0.25: R7.2 25.64,97.97 25.64,107.874 op5.7 27.036,108.764 D6.K 32.37,111.05 D5.A 35.56,115.48 R6.1
NetJST2_1: JST2.1 op4.3 Pot6.2 | length 111.2
  Top Layer w0.25: JST2.1 38.728,57.907 39.079,57.556 39.079,56.744 38.728,56.393 38.728,51.061 v1(48.133,41.656)
  Bottom Layer w0.25: Pot6.2 11.256,23.074 8.527,23.074 4.045,27.557 4.045,28.323 6.132,30.41 36.722,30.41 41.301,34.99 42.686,34.99 49.352,41.656 ; v1(48.133,41.656) 49.352,41.656 ; op4.3 49.352,41.656
NetJST2_3: JST2.3 LDR2.2 op4.7 R19.2 | length 64
  Top Layer w0.25: JST2.3 43.728,50.557 v1(48.641,45.644)
  Bottom Layer w0.25: v1(48.641,45.644) 67.64,45.644 op4.7 68.198,43.306 68.198,41.287 69.029,40.456 72.828,40.456 R19.2 75.565,37.846 79.121,34.29 LDR2.2
NetJST2_5: JST2.5 R20.2 | length 12.1
  Bottom Layer w0.25: JST2.5 50.506,71.12 R20.2
NetJST3_2: JST3.2 R20.1 | length 49.8
  Top Layer w0.25: R20.1 72.466,67.742 v1(72.466,49.124)
  Bottom Layer w0.25: v1(72.466,49.124) 74.469,49.124 77.182,46.41 77.182,43.667 79.829,41.02 88.507,41.02 90.127,42.64 JST3.2
NetJST4_2: JST4.2 R62.1 | length 7.3
  Top Layer w0.25: R62.1 176.53,16.654 JST4.2
NetJST5_2: JST5.2 R9.2 R10.2 | length 50.6
  Top Layer w0.25: R10.2 R9.2
  Bottom Layer w0.25: JST5.2 26.09,90.88 26.09,125.15 R10.2
NetJST5_3: JST5.3 op5.1 op5.2 | length 27.9
  Top Layer w0.25: op5.1 op5.2 14.825,106.779 14.825,96.697 18.36,93.162 JST5.3
NetJST5_5: JST5.5 R8.2 | length 60.9
  Top Layer w0.25: v1(42.469,72.466) 42.469,48.971 R8.2
  Bottom Layer w0.25: JST5.5 20.039,78.971 35.964,78.971 v1(42.469,72.466)
NetJST6_2: JST6.2 R8.1 | length 11.3
  Top Layer w0.25: R8.1 35.45,54.5 JST6.2
NetJST7_3: JST7.3 Op12.7 R60.1 | length 62.9
  Top Layer w0.25: JST7.3 188.151,25.089 188.151,56.071 Op12.7
  Bottom Layer w0.25: R60.1 191.869,44.56 192.66,45.351 192.66,57.519 192.139,58.04 190.12,58.04 Op12.7
NetJST7_5: JST7.5 R62.2 | length 8.6
  Bottom Layer w0.25: R62.2 187.412,20.828 JST7.5
NetJST10_2: JST10.2 R63.2 | length 5.5
  Top Layer w0.25: R63.2 193.04,123.19 JST10.2
NetLDR2_1: LDR2.1 op4.6 R17.1 R19.1 | length 19.5
  Top Layer w0.25: op4.6 68.198,40.766 68.198,36.34 LDR2.1
  Bottom Layer w0.25: R17.1 LDR2.1 ; op4.6 74.278,46.846 R19.1
NetOp1_6: Op1.6 Op1.7 R1.1 R23.1 R26.1 | length 45.8
  Top Layer w0.25: R23.1 R26.1 ; Op1.7 Op1.6 26.1,28.32 26.1,26.301 26.621,25.78 29.48,25.78 R1.1
  Bottom Layer w0.25: R23.1 17.29,30.86 26.1,30.86 Op1.7
Netop2_1: op2.1 Pot2.2 R11.2 | length 160.9
  Top Layer w0.25: op2.1 57.893,56.435 ; Pot2.2 74.72,17.094 ; R11.2 96.52,38.125 87.198,28.804 87.198,22.758 87.452,22.504 87.452,18.39 86.157,17.094 74.72,17.094 ; 57.893,56.435 57.887,56.429 57.887,19.927 60.719,17.094 62.131,17.094 ; 57.893,56.435 57.893,21.332 62.131,17.094 ; 62.131,17.094 74.72,17.094 ; 62.131,17.094 62.944,16.281 73.907,16.281 74.72,17.094
Netop2_3: op2.3 R11.1 R12.2 | length 44.1
  Top Layer w0.25: R12.2 80.518,62.071 80.772,61.817 v1(80.772,61.722)
  Bottom Layer w0.25: op2.3 67.807,54.61 74.969,61.773 80.721,61.773 86.234,56.26 95.784,56.26 R11.1
Netop2_6: op2.6 op2.7 R3.1 | length 22.7
  Top Layer w0.25: op2.6 op2.7
  Bottom Layer w0.25: op2.6 78.917,54.61 81.088,52.439 81.088,51.701 79.679,50.292 R3.1
Netop3_1: op3.1 op3.2 Pot3.1 | length 42.2
  Top Layer w0.25: op3.1 op3.2 83.86,53.488 Pot3.1
Netop3_3: op3.3 R3.2 R4.2 | length 19.9
  Top Layer w0.25: op3.3 79.308,55.5 79.308,60.487 79.864,61.043 81.307,61.043 83.058,62.794 R4.2
  Bottom Layer w0.25: R3.2 75.35,59.292 80.032,54.61 op3.3
Netop3_5: op3.5 Pot3.2 | length 33.8
  Top Layer w0.25: Pot3.2 86.36,50.292 op3.5
Netop3_6: op3.6 op3.7 R14.2 | length 18.9
  Top Layer w0.25: op3.6 op3.7 87.248,58.04 87.248,66.31 R14.2
Netop4_1: op4.1 op4.2 R17.2 | length 44.4
  Top Layer w0.25: R17.2 58.818,21.044 60.467,19.395 61.233,19.395 62.038,20.2 62.038,43.306 op4.2 op4.1
Netop6_1: op6.1 op6.5 R15.2 | length 65.6
  Top Layer w0.25: R15.2 76.363,66.275 76.363,47.026 79.829,43.56 80.567,43.56 81.088,44.081 81.088,46.1 op6.1
  Bottom Layer w0.25: op6.1 83.663,50.455 92.331,50.455 94.197,48.589 94.197,42.234 93.619,41.656 90.424,41.656 op6.5
Netop6_2: op6.2 R14.1 R15.1 | length 30.5
  Top Layer w0.25: op6.2 78.858,45.79 78.858,69.46 R15.1
  Bottom Layer w0.25: R15.1 R14.1
Netop6_3: op6.3 R13.1 R16.1 | length 30
  Top Layer w0.25: R13.1 80.173,28.975 80.173,34.673 79.308,35.538 79.308,41.02 op6.3
  Bottom Layer w0.25: op6.3 84.328,41.91 R16.1
Netop6_6: op6.6 op6.7 R18.1 | length 11.2
  Top Layer w0.25: op6.7 op6.6 90.678,39.37 R18.1
Netop7_1: op7.1 Pot8.2 R34.2 | length 63.1
  Top Layer w0.25: Pot8.2 97.79,64.626 R34.2
  Bottom Layer w0.25: R34.2 99.621,64.607 111.531,64.607 op7.1
Netop7_3: op7.3 R34.1 R36.2 | length 31.8
  Bottom Layer w0.25: R34.1 112.776,70.612 122.616,70.612 ; op7.3 122.616,70.612 ; R36.2 122.616,70.612
Netop7_6: op7.6 op7.7 R33.1 | length 10.9
  Top Layer w0.25: op7.6 op7.7 122.302,64.898 122.302,70.738 R33.1
Netop8_1: op8.1 op8.2 Pot9.1 | length 34.4
  Top Layer w0.25: Pot9.1 112.054,49.89 op8.2 op8.1
Netop8_3: op8.3 R33.2 R35.2 | length 28.9
  Top Layer w0.25: R33.2 112.412,58.729 114.362,56.779 114.362,49.658 op8.3
  Bottom Layer w0.25: R35.2 107.823,71.755 112.285,71.755 R33.2
Netop8_5: op8.5 Pot9.2 | length 29
  Top Layer w0.25: Pot9.2 118.019,23.531 118.019,42.835 op8.5
Netop8_6: op8.6 op8.7 R37.2 | length 31.4
  Top Layer w0.25: op8.6 op8.7
  Bottom Layer w0.25: op8.6 120.522,47.878 120.522,45.632 133.46,32.694 R37.2
Netop9_1: op9.1 op9.5 R45.2 | length 18
  Top Layer w0.25: op9.5 121.412,33.435 122.03,32.817 R45.2
  Bottom Layer w0.25: op9.1 120.924,33.696 121.244,33.696 op9.5
Netop9_2: op9.2 R37.1 R45.1 | length 24.2
  Top Layer w0.25: R45.1 113.03,32.106 112.582,32.555 112.582,37.718 op9.2
  Bottom Layer w0.25: R45.1 114.3,25.654 R37.1
Netop9_3: op9.3 R38.1 R46.1 | length 31.4
  Top Layer w0.25: R38.1 R46.1
  Bottom Layer w0.25: op9.3 115.782,36.068 131.276,20.574 R46.1
Netop9_6: op9.6 op9.7 R39.2 R40.2 R41.2 R42.2 R43.2 R44.2 | length 42.8
  Top Layer w0.25: op9.6 op9.7 ; R44.2 R43.2 125.095,39.751 125.095,45.847 R42.2 124.841,46.101 124.841,52.197 R41.2 R40.2 130.556,64.008 R39.2
  Bottom Layer w0.25: op9.7 122.428,39.624 R43.2
NetOp10_2: Op10.2 R47.1 R49.2 | length 24.2
  Bottom Layer w0.25: R49.2 R47.1 182.88,78.74 Op10.2
NetOp10_6: Op10.6 R51.1 R53.1 | length 68.1
  Top Layer w0.25: R51.1 171.33,45.49 171.33,62.072 181.265,72.007 181.265,80.973 186.307,86.015 194.765,86.015 R53.1 195.555,84.955 195.555,84.115 Op10.6
NetOp11_2: Op11.2 R48.1 R50.2 | length 37.1
  Bottom Layer w0.25: R50.2 170.125,64.88 170.235,64.77 R48.1 191.759,64.77 195.2,61.329 195.2,60.591 194.679,60.07 193.919,60.07 192.139,61.85 190.12,61.85 Op11.2
NetOp11_6: Op11.6 R52.1 R54.1 | length 29.7
  Top Layer w0.25: R52.1 179.415,73.315 179.415,85.435 R54.1
  Bottom Layer w0.25: R52.1 181.705,73.755 187.078,73.755 188.138,72.695 188.138,71.069 189.138,70.069 190.601,70.069 Op11.6
NetOp12_1: Op12.1 Op12.2 R56.1 | length 21.3
  Bottom Layer w0.25: R56.1 172.72,43.108 179.957,50.345 185.555,50.345 Op12.1 Op12.2
NetOp12_3: Op12.3 Op13.7 R57.2 | length 27.5
  Top Layer w0.25: v1(188.366,59.08) 189.484,59.08 190.144,58.42 190.144,46.634 ; Op13.7 190.144,46.634 ; Op12.3 191.77,48.26 190.144,46.634
  Bottom Layer w0.25: R57.2 181.94,60.02 187.427,60.02 v1(188.366,59.08)
NetOp12_6: Op12.6 R55.2 R56.2 R60.2 | length 46.4
  Top Layer w0.25: R56.2 173.66,49.86 v1(173.66,35.611) ; R55.2 R60.2
  Bottom Layer w0.25: R56.2 185.42,50.8 Op12.6 ; v1(173.66,35.611) 173.685,35.585 180.315,35.585 R60.2
NetOp13_2: Op13.2 R59.2 R61.1 | length 30.7
  Top Layer w0.25: R59.2 R61.1
  Bottom Layer w0.25: R61.1 173.865,34.055 185.505,34.055 Op13.2
NetOp13_6: Op13.6 R57.1 R58.1 | length 37.7
  Top Layer w0.25: R58.1 176.53,31.64 176.53,45.61 R57.1
  Bottom Layer w0.25: R57.1 182.197,47.563 189.927,47.563 Op13.6
NetPot1_2: Pot1.2 R22.1 | length 40.9
  Top Layer w0.25: R22.1 23.785,49.765 23.785,23.245 Pot1.2
NetPot2_1: Pot2.1 R2.2 | length 5.1
  Bottom Layer w0.25: R2.2 71.628,18.542 Pot2.1
NetPot5_1: Pot5.1 R7.1 | length 27.4
  Bottom Layer w0.25: R7.1 19.439,93.391 19.439,85.545 20.413,84.571 30.021,84.571 Pot5.1
NetPot7_1: Pot7.1 R26.2 | length 54.3
  Top Layer w0.25: v1(33.299,43.891) 50.8,26.391 Pot7.1
  Bottom Layer w0.25: R26.2 20.879,43.891 v1(33.299,43.891)
NetPot7_3: Pot7.3 R27.1 | length 52.5
  Top Layer w0.25: R27.1 32.37,53.99 32.37,43.559 41.13,34.798 41.13,26.485 49.644,17.971 54.721,17.971 Pot7.3
NetPot8_1: Pot8.1 R32.2 | length 7.7
  Top Layer w0.25: Pot8.1 96.774,19.78 R32.2
pads on no net: Aud1.4 Aud1.5 Aud5.4 Aud5.5 JST2.6 JST5.6 JST7.6

## Polygon pours and split planes (outlines as drawn)
GND on Top Layer "GND_L01_P000" (solid, pour order 0): 0.457,159.461 44.374,159.461 44.374,79.578 153.543,79.578 153.543,159.461 199.695,159.461 199.695,10.744 0.457,10.744
GND on Bottom Layer "GND_L02_P003" (solid, pour order 3): 0.368,159.487 44.285,159.487 44.285,79.604 153.454,79.604 153.454,159.487 199.606,159.487 199.606,10.77 0.368,10.77

## Text inside footprints (layer, text, board x,y; h text height)
C1: Top Overlay "47nF" at 36.449,31.044 h1.52 r90
C2: Top Overlay "33uF" at 48.181,54.229 h1.52
C3: Top Overlay "33uF" at 48.181,44.069 h1.52
C4: Top Overlay "33uF" at 48.181,33.909 h1.52
C5: Top Overlay "100nF" at 7.62,94.234 h1.52 r90
C6: Top Overlay "100nF" at 34.529,94.413 h1.52 r90
C7: Top Overlay "22nF" at 7.874,106.68 h1.52 r90
C8: Top Overlay "33uF" at 48.181,23.749 h1.52
C9: Top Overlay "10nF" at 62.921,23.241 h1.52
C10: Top Overlay "4.7nF" at 21.209,70.866 h1.52 r90
C11: Top Overlay "10uF" at 19.209,42.672 h1.52
C12: Top Overlay "22nF" at 42.799,30.734 h1.52 r90
C13: Top Overlay "4.7nF" at 13.589,70.866 h1.52 r90
C14: Top Overlay "1.5nF" at 28.956,70.993 h1.52 r90
C15: Top Overlay "100nF" at 26.543,43.561 h1.52
C16: Top Overlay "33uF" at 101.013,33.401 h1.52
C17: Top Overlay "33uF" at 101.013,43.561 h1.52
C18: Top Overlay "33uF" at 101.013,53.721 h1.52
C19: Top Overlay "33uF" at 101.013,23.241 h1.52
C20: Top Overlay "10nF" at 136.271,71.247 h1.52 r270
C21: Top Overlay "10nF" at 136.271,61.087 h1.52 r270
C22: Top Overlay "10nF" at 136.271,50.927 h1.52 r270
C23: Top Overlay "10nF" at 136.271,40.767 h1.52 r270
C24: Top Overlay "10nF" at 136.271,30.607 h1.52 r270
C25: Top Overlay "10nF" at 136.271,20.137 h1.52 r270
C26: Top Overlay "47nF" at 163.576,70.668 h1.52 r90
C27: Top Overlay "47nF" at 163.576,58.364 h1.52 r90
C28: Top Overlay "47nF" at 163.576,47.498 h1.52 r90
C29: Top Overlay "47nF" at 163.576,35.504 h1.52 r90
C30: Top Overlay "47nF" at 163.83,24.13 h1.52 r90
C31: Top Overlay "47nF" at 163.83,13.264 h1.52 r90
C32: Top Overlay "2200uF" at 198.12,139.192 h1.52 r90; Top Overlay "+" at 178.121,142.748 h1.52
C33: Top Overlay "100uF" at 168.656,113.919 h1.52
C34: Top Overlay "0.22uF" at 162.814,100.036 h1.52 r90
C35: Top Overlay "100nF" at 177.602,125.222 h1.52 r90
C36: Top Overlay "2200uF" at 175.26,139.192 h1.52 r90; Top Overlay "+" at 155.261,142.748 h1.52
C37: Top Overlay "0.22uF" at 198.374,100.036 h1.52 r90
C38: Top Overlay "100uF" at 179.88,113.919 h1.52
C39: Top Overlay "100nF" at 188.778,125.476 h1.52 r90
JST3: Top Overlay "-" at 89.831,44.18 h1.52 r270; Top Overlay "+" at 89.831,39.989 h1.52 r270
JST4: Top Overlay "-" at 174.99,11.853 h1.52; Top Overlay "+" at 179.181,11.853 h1.52
JST6: Top Overlay "-" at 36.56,53.763 h1.52; Top Overlay "+" at 40.751,53.763 h1.52
JST10: Top Overlay "-" at 195.85,127.847 h1.52 r180; Top Overlay "+" at 191.659,127.847 h1.52 r180
LED2: Top Overlay "+" at 70.104,27.305 h1.52; Top Overlay "LED" at 72.644,22.987 h1.52
LED3: Top Overlay "+" at 146.177,77.724 h1.52 r270
LED4: Top Overlay "+" at 146.177,66.294 h1.52 r270
LED5: Top Overlay "+" at 146.177,54.864 h1.52 r270
LED6: Top Overlay "+" at 146.177,43.434 h1.52 r270
LED7: Top Overlay "+" at 146.177,32.004 h1.52 r270
LED8: Top Overlay "+" at 146.431,20.042 h1.52 r270
R1: Top Overlay "10k" at 33.02,25.908 h1.52
R2: Top Overlay "2k" at 63.898,19.558 h1.52
R3: Top Overlay "220k" at 75.946,52.18 h1.52 r90
R4: Top Overlay "82k" at 85.598,64.262 h1.52
R5: Top Overlay "10k" at 15.86,116.638 h1.52
R6: Top Overlay "47k" at 27.434,116.638 h1.52
R7: Top Overlay "10k" at 18.288,96.266 h1.52
R8: Top Overlay "4.7k" at 37.355,43.561 h1.52
R9: Top Overlay "100" at 35.052,129.54 h1.52 r90
R10: Top Overlay "100" at 28.702,129.794 h1.52 r90
R11: Top Overlay "100k" at 97.206,48.514 h1.52 r90
R12: Top Overlay "68k" at 74.312,63.754 h1.52
R13: Top Overlay "4.7k" at 81.17,27.178 h1.52
R14: Top Overlay "100k" at 84.946,70.358 h1.52
R15: Top Overlay "100k" at 73.406,70.612 h1.52
R16: Top Overlay "47k" at 92.71,52.324 h1.52 r90
R17: Top Overlay "4.7k" at 60.706,33.528 h1.52
R18: Top Overlay "82" at 84.582,33.274 h1.52
R19: Top Overlay "47k" at 76.2,40.386 h1.52 r90
R20: Top Overlay "4.7k" at 62.23,70.358 h1.52
R21: Top Overlay "10k" at 7.874,27.178 h1.52
R22: Top Overlay "10k" at 18.542,58.674 h1.52 r90
R23: Top Overlay "3.3k" at 6.858,42.418 h1.52
R24: Top Overlay "3.3k" at 6.985,34.849 h1.52
R25: Top Overlay "22k" at 12.192,58.42 h1.52 r90
R26: Top Overlay "1.8k" at 7.112,50.038 h1.52
R27: Top Overlay "1.8k" at 31.123,57.935 h1.52 r90
R28: Top Overlay "270" at 5.842,58.42 h1.52 r90
R29: Top Overlay "1k" at 16.622,131.226 h1.52 r90
R30: Top Overlay "1M" at 24.892,59.292 h1.52 r90
R31: Top Overlay "1k" at 10.272,130.862 h1.52 r90
R32: Top Overlay "2k" at 96.012,31.496 h1.52 r270
R33: Top Overlay "220k" at 114.19,70.866 h1.52
R34: Top Overlay "100k" at 100.584,64.77 h1.52
R35: Top Overlay "82k" at 101.346,71.12 h1.52
R36: Top Overlay "68k" at 127.254,69.85 h1.52
R37: Top Overlay "100k" at 126.492,24.638 h1.52
R38: Top Overlay "3.3k" at 126.636,14.986 h1.52
R39: Top Overlay "82" at 127.364,63.5 h1.52
R40: Top Overlay "82" at 127.872,57.404 h1.52
R41: Top Overlay "82" at 127.762,51.562 h1.52
R42: Top Overlay "82" at 128.126,45.212 h1.52
R43: Top Overlay "82" at 128.524,38.862 h1.52
R44: Top Overlay "82" at 128.27,32.512 h1.52
R45: Top Overlay "100k" at 115.172,26.162 h1.52
R46: Top Overlay "47k" at 127.254,19.812 h1.52
R47: Top Overlay "10k" at 173.482,72.644 h1.52 r90
R48: Top Overlay "10k" at 173.482,58.42 h1.52 r90
R49: Top Overlay "10k" at 168.656,72.534 h1.52 r90
R50: Top Overlay "10k" at 168.402,58.784 h1.52 r90
R51: Top Overlay "10k" at 168.402,44.45 h1.52 r90
R52: Top Overlay "10k" at 181.102,65.786 h1.52 r90
R53: Top Overlay "10k" at 189.738,84.582 h1.52
R54: Top Overlay "10k" at 181.102,80.01 h1.52 r90
R55: Top Overlay "10k" at 181.102,26.924 h1.52 r90
R56: Top Overlay "10k" at 173.482,44.34 h1.52 r90
R57: Top Overlay "10k" at 181.102,52.07 h1.52 r90
R58: Top Overlay "10k" at 173.482,30.734 h1.52 r90
R59: Top Overlay "10k" at 168.402,16.4 h1.52 r90
R60: Top Overlay "100k" at 181.102,37.592 h1.52 r90
R61: Top Overlay "10k" at 168.402,30.48 h1.52 r90
R62: Top Overlay "4.7k" at 174.244,20.066 h1.52
R63: Top Overlay "3.3k" at 196.469,112.395 h1.52 r90